# Altium PCB 40AL..08.pcbdoc
Units mm, origin at the board's own origin, x right, y up, seen from the top; angles counter-clockwise.
Board outline 58.06 x 42.2 mm, 2 copper layers (Top Layer, Bottom Layer); 1 components, 0 nets, 56 pads, 0 vias.
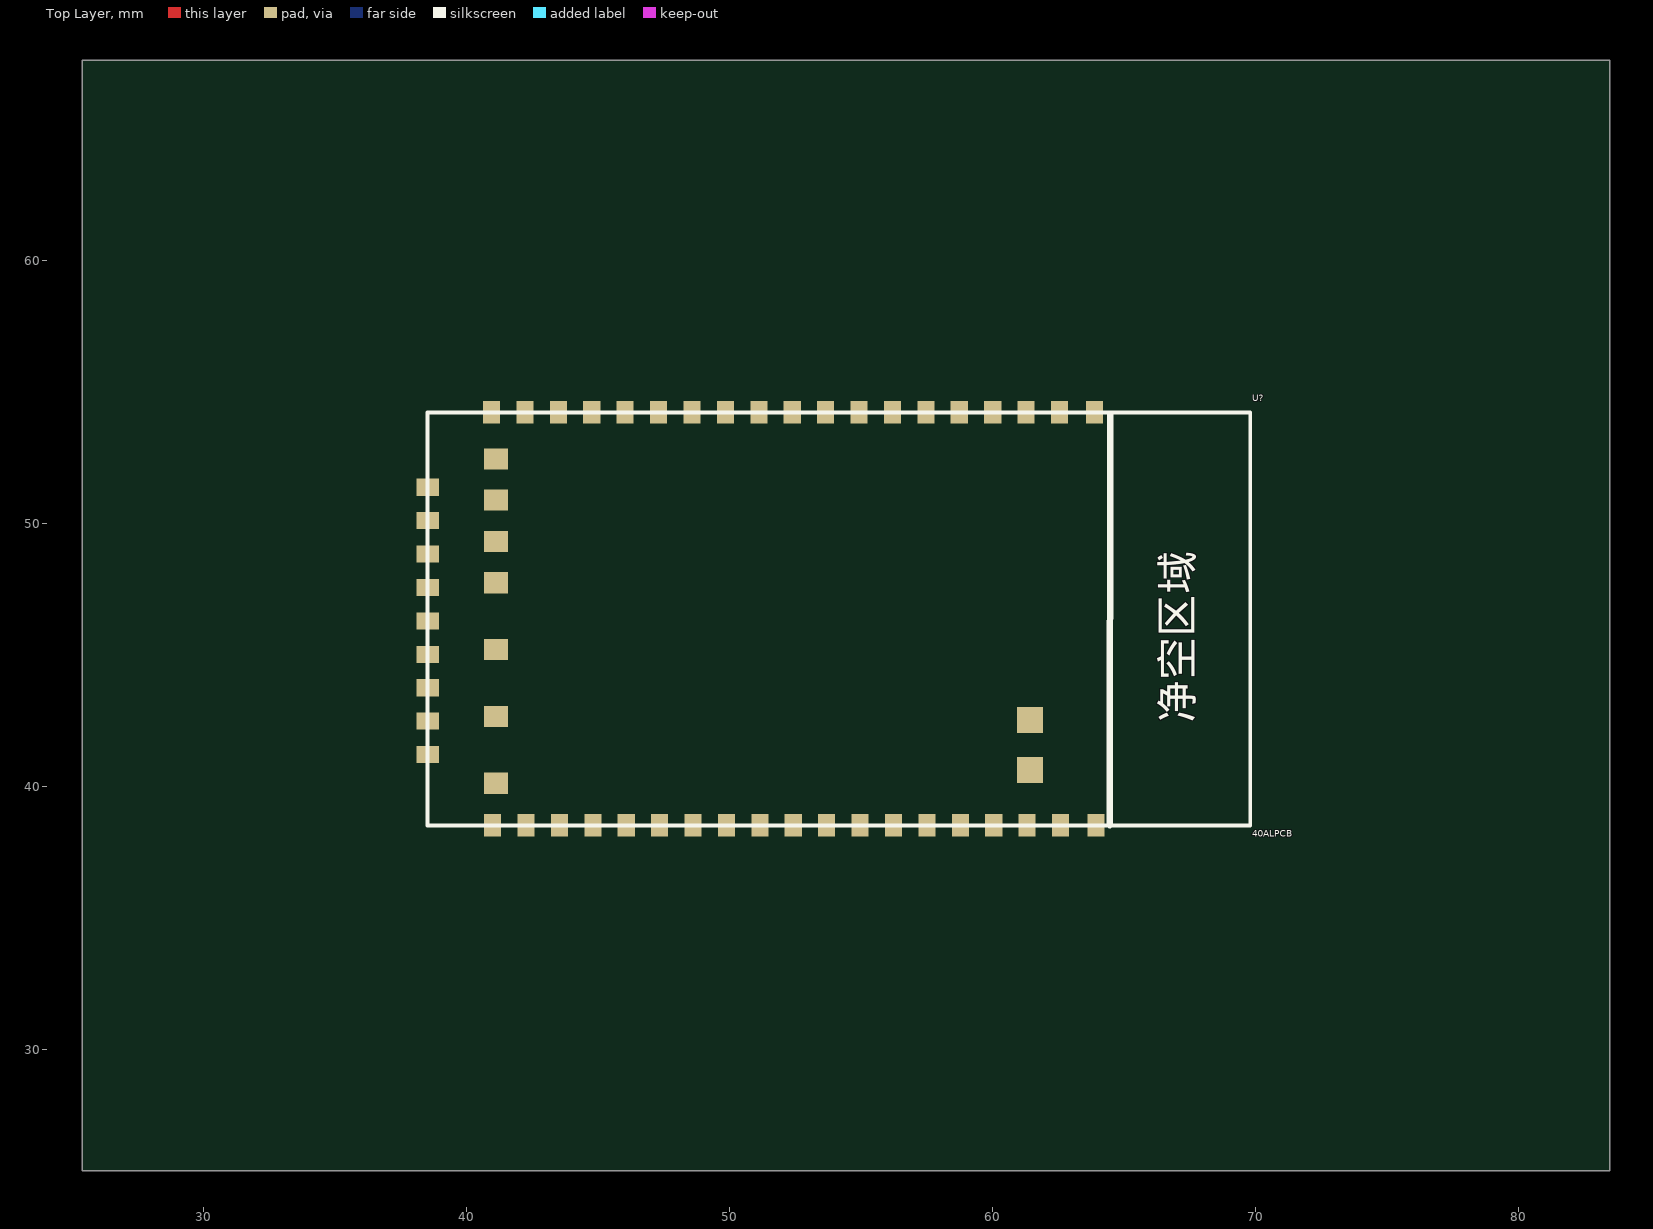
[diagram p0: Top Layer view]
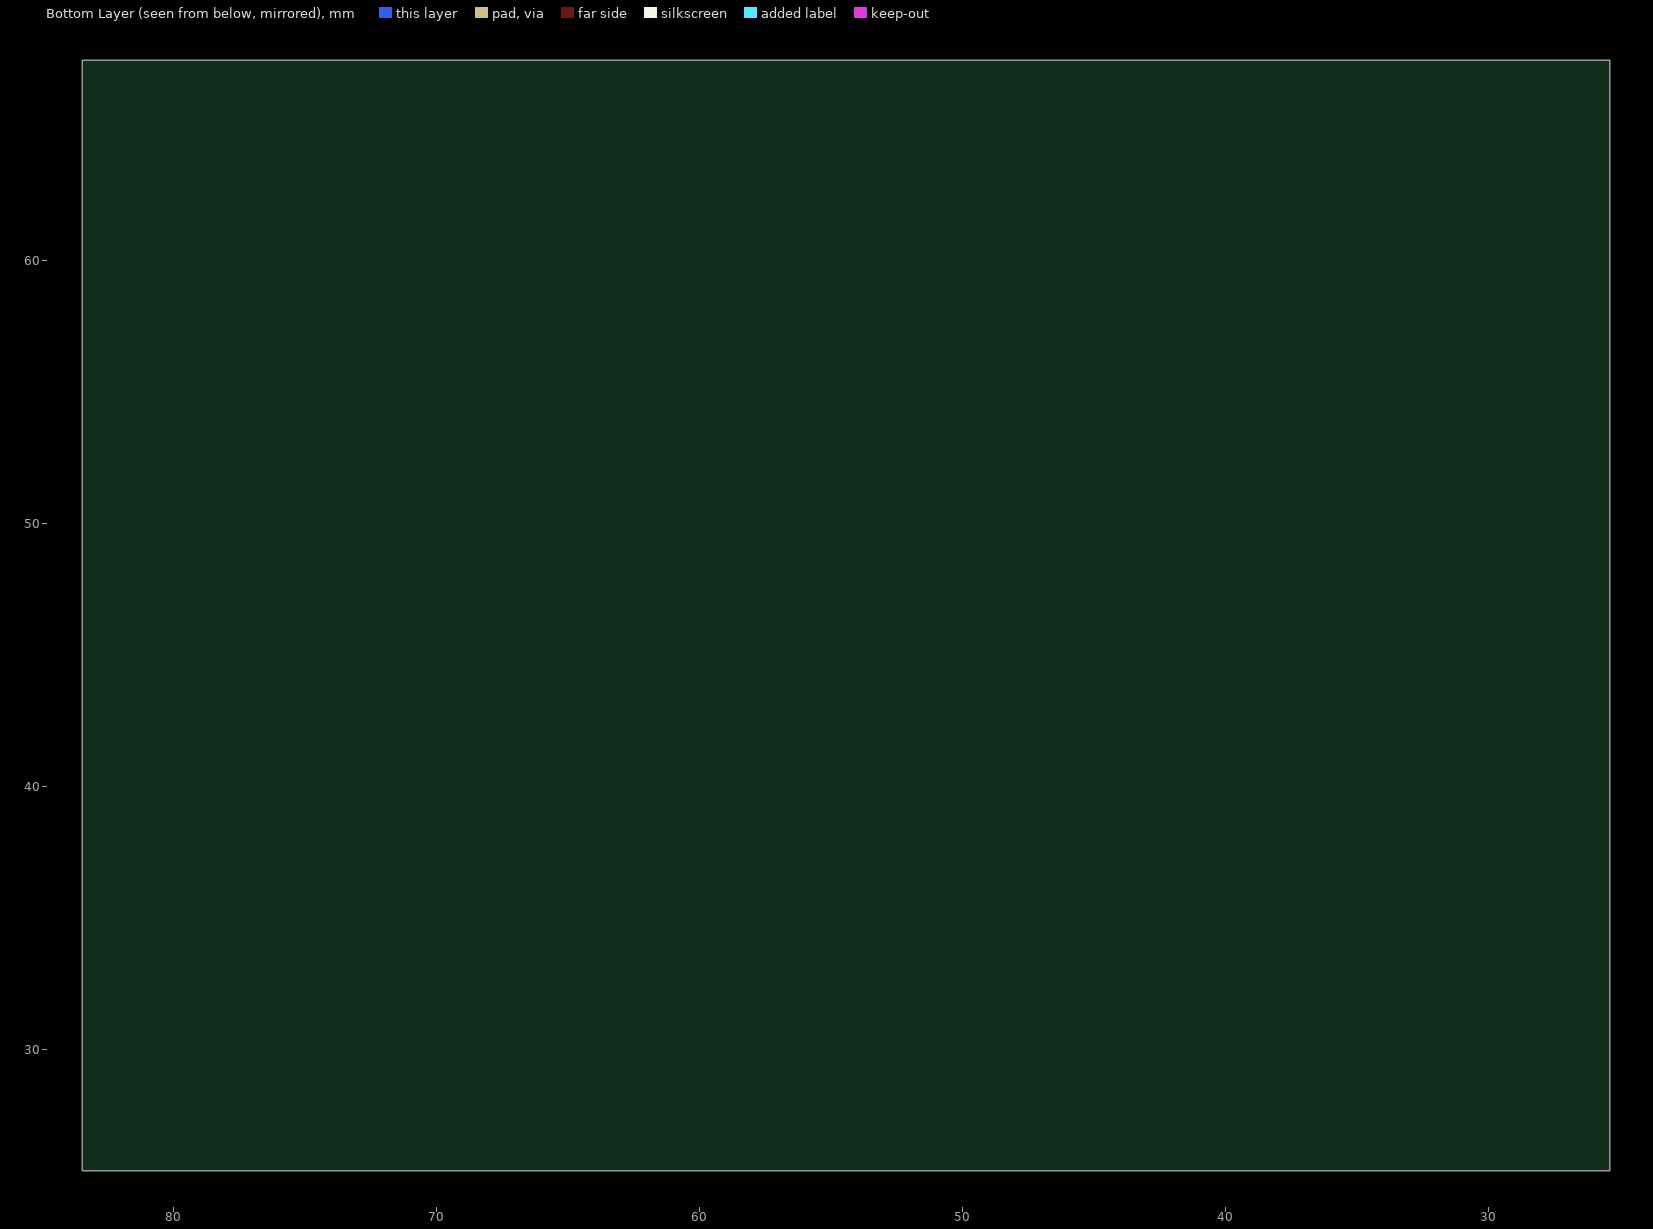
[diagram p1: Bottom Layer view, seen from below]

## Layer stack, top to bottom
Top Layer: signal copper (thickness not stored)
Dielectric: dielectric 0.32, FR-4, Dk 4.8
Bottom Layer: signal copper (thickness not stored)

## Board outline
83.458,25.4 25.4,25.4 25.4,67.604 83.458,67.604

## Components (designator, comment, footprint, x,y, rotation, side; value= is the part's Value field where it differs from the comment)
U? "40ALPCB" 40ALPCB 53.984,46.375 r0 top

## Footprints (in the part's own frame and the unit in brackets; to place one, negate y for a bottom-side part, rotate by r counter-clockwise, add the part's x,y. Pads: shape width x height; smd on the part's side, far side on the other; paste and mask are expansions set on the pad)
40ALPCB [mm]
  rect 1x1 smd paste+0 mask+0.102: 1(7.441,-3.85) 56(7.441,-5.75)
  rect 0.65x0.85 smd paste+0 mask+0.102: 2(-13.029,7.85) 3(-11.759,7.85) 4(-10.489,7.85) 5(-9.219,7.85) 6(-7.949,7.85) 7(-6.679,7.85) 8(-5.409,7.85) 9(-4.139,7.85) 10(-2.869,7.85) 11(-1.599,7.85) 12(-0.329,7.85) 13(0.941,7.85) 14(2.211,7.85) 15(3.481,7.85) 16(4.751,7.85) 17(6.021,7.85) 18(7.291,7.85) 19(8.561,7.85) 20(9.895,7.85) 21(-12.989,-7.85) 22(-11.719,-7.85) 23(-10.449,-7.85) 24(-9.179,-7.85) 25(-7.909,-7.85) 26(-6.639,-7.85) 27(-5.369,-7.85) 28(-4.099,-7.85) 29(-2.829,-7.85) 31(-0.289,-7.85) 32(0.981,-7.85) 33(2.251,-7.85) 34(3.521,-7.85) 35(4.791,-7.85) 36(6.061,-7.85) 37(7.331,-7.85) 38(8.601,-7.85) 39(9.943,-7.85) DP(-1.559,-7.85)
  rect 0.85x0.65 smd paste+0 mask+0.102: 40(-15.459,5) 41(-15.459,3.73) 42(-15.459,2.46) 43(-15.459,1.19) 44(-15.459,-0.08) 45(-15.459,-1.35) 46(-15.459,-2.62) 47(-15.459,-3.89) 48(-15.459,-5.16)
  rect 0.9x0.8 smd paste+0 mask+0.102: 49(-12.86,6.078) 50(-12.86,4.509) 51(-12.86,2.94) 52(-12.859,1.37) 53(-12.859,-1.17) 54(-12.859,-3.71) 55(-12.859,-6.25)
  silkscreen extent -15.46,-7.85 15.81,7.86

## Nets (pads, with @x,y where several pads share a name; then routed paths per layer and width w, separated by ;. In a path a pad name is that pad's centre, name@x,y a point inside that pad or via, vN(x,y) a via of type N, cw(c..) or ccw(c..) an arc to the next point about the centre after c; other vN are vias at no path point)
pads on no net: U?.1 U?.2 U?.3 U?.4 U?.5 U?.6 U?.7 U?.8 U?.9 U?.10 U?.11 U?.12 U?.13 U?.14 U?.15 U?.16 U?.17 U?.18 U?.19 U?.20 U?.21 U?.22 U?.23 U?.24 U?.25 U?.26 U?.27 U?.28 U?.29 U?.31 U?.32 U?.33 U?.34 U?.35 U?.36 U?.37 U?.38 U?.39 U?.40 U?.41 U?.42 U?.43 U?.44 U?.45 U?.46 U?.47 U?.48 U?.49 U?.50 U?.51 U?.52 U?.53 U?.54 U?.55 U?.56 U?.DP

## Silkscreen, mask and mechanical layers (free items; w line width, h text height)
Document:
  lines w0.003: 54.429,46.502 54.429,46.502

## Text inside footprints (layer, text, board x,y; h text height)
U?: Top Overlay "净空区域" at 67.99,42.412 h2.03 r90